# Altium PCB sheet1.PcbDoc
Units mm, origin at the board's own origin, x right, y up, seen from the top; angles counter-clockwise.
Board outline 22.04 x 29.91 mm, 2 copper layers (Top Layer, Bottom Layer); 6 components, 6 nets, 18 pads, 0 vias.
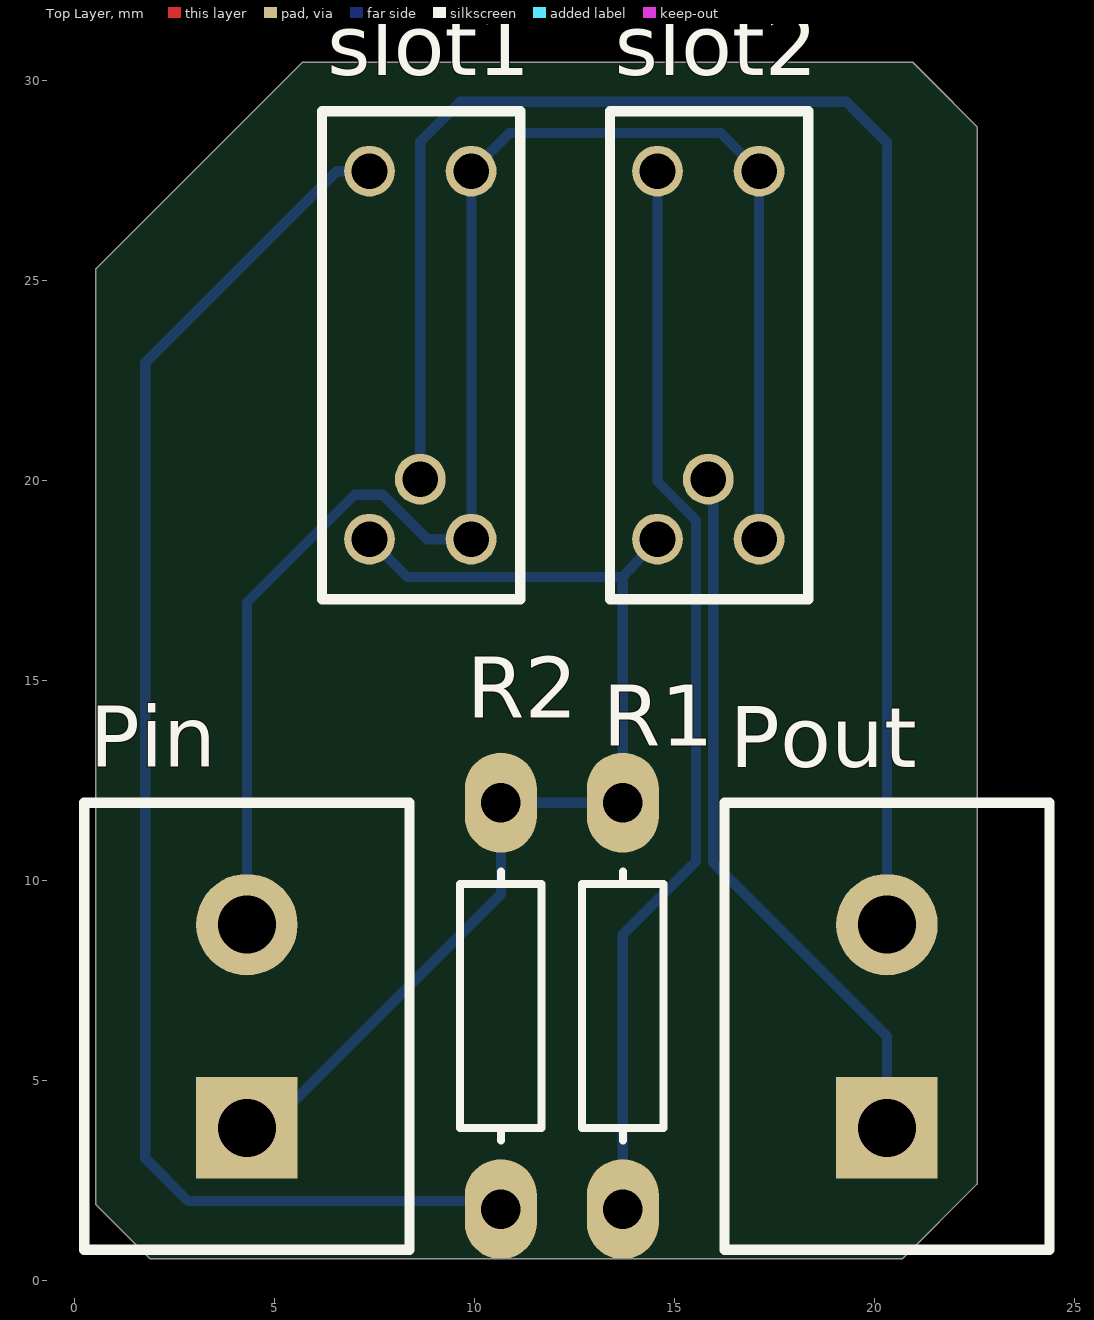
[diagram p0: Top Layer view]
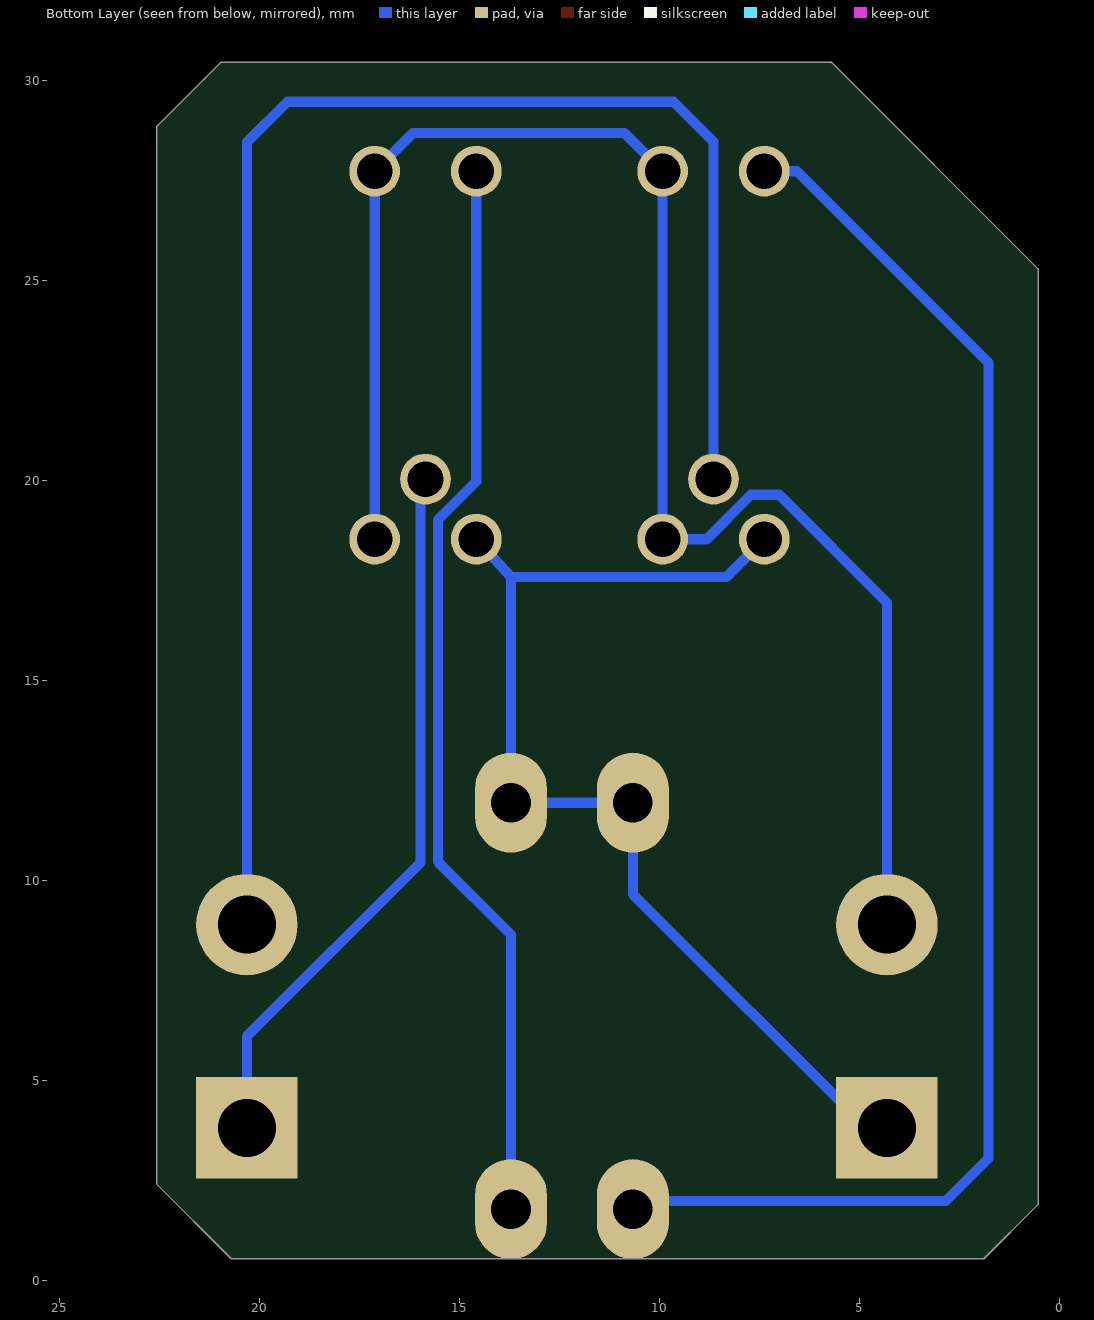
[diagram p1: Bottom Layer view, seen from below]

## Layer stack, top to bottom
Top Solder: solder mask 0.0102, Solder Resist, Dk 3.5
Top Layer: signal copper 0.0356
Dielectric1: dielectric 0.32, FR-4, Dk 4.8
Bottom Layer: signal copper 0.0356
Bottom Solder: solder mask 0.0102, Solder Resist, Dk 3.5

## Board outline
0.539,1.896 1.896,0.539 20.71,0.539 22.575,2.404 22.575,28.838 21.388,30.024 20.964,30.449 5.706,30.449 0.539,25.282

## Design rules (kind name [scope] priority, off if disabled: settings)
AssemblyTestPointUsage [All] p1: valid=2
BoardOutlineClearance [All] p1: gap=0.254
Clearance [All] p1: gap=0.178
ComponentClearance [All] p1: gap=0 collisioncheckmode=3 verticalgap=0 showdistances=FALSE
FabricationTestPointUsage [All] p1: valid=2 allowmultiple=FALSE
FabricationTestPointUsage TestPointUsage [All] p2: valid=0 allowmultiple=FALSE
FabricationTestpoint Testpoint [All] p2: side=3 testpointundercomponent=TRUE minsize=1.016 maxsize=2.54 preferedsize=1.524 minholesize=0 maxholesize=1.016 preferedholesize=0.813 testpointgrid=0.025 allowsidetop=TRUE allowsidebottom=TRUE usegrid=TRUE gridtolerance=0
Height [All] p1: minheight=0 maxheight=50.8 prefheight=12.7
HoleSize NPTH_withPads [(PadIsPlated = 'False') AND ((HoleDiameter < PadXSize_AllLayers ) OR (HoleDiameter < PadYSize_AllLayers))] p1: absolutevalues=TRUE maxlimit=0 minlimit=0 maxpercent=80.000 minpercent=20.000
HoleSize PadlessThruHole [(PadIsPlated = 'True') And ((HoleDiameter >= PadXSize_AllLayers ) OR (HoleDiameter >= PadYSize_AllLayers))] p2: absolutevalues=TRUE maxlimit=0 minlimit=0 maxpercent=80.000 minpercent=20.000
HoleSize HoleSize20 [HoleSize = 20 AND NOT(PadIsPlated)] p3: absolutevalues=TRUE maxlimit=0.508 minlimit=0.508 maxpercent=80.000 minpercent=20.000
HoleSize HoleSize20_p [HoleSize = 17 AND PadIsPlated] p4: absolutevalues=TRUE maxlimit=0.432 minlimit=0.432 maxpercent=80.000 minpercent=20.000
HoleSize HoleSize28 [HoleSize = 28 AND NOT(PadIsPlated)] p5: absolutevalues=TRUE maxlimit=0.711 minlimit=0.711 maxpercent=80.000 minpercent=20.000
HoleSize HoleSize28_p [HoleSize = 25 AND PadIsPlated] p6: absolutevalues=TRUE maxlimit=0.635 minlimit=0.635 maxpercent=80.000 minpercent=20.000
HoleSize HoleSize35 [HoleSize = 35 AND NOT(PadIsPlated)] p7: absolutevalues=TRUE maxlimit=0.889 minlimit=0.889 maxpercent=80.000 minpercent=20.000
HoleSize HoleSize35_p [HoleSize = 32 AND PadIsPlated] p8: absolutevalues=TRUE maxlimit=0.813 minlimit=0.813 maxpercent=80.000 minpercent=20.000
HoleSize HoleSize38 [HoleSize = 38 AND NOT(PadIsPlated)] p9: absolutevalues=TRUE maxlimit=0.965 minlimit=0.965 maxpercent=80.000 minpercent=20.000
HoleSize HoleSize38_p [HoleSize = 35 AND PadIsPlated] p10: absolutevalues=TRUE maxlimit=0.889 minlimit=0.889 maxpercent=80.000 minpercent=20.000
HoleSize HoleSize42 [HoleSize = 42 AND NOT(PadIsPlated)] p11: absolutevalues=TRUE maxlimit=1.067 minlimit=1.067 maxpercent=80.000 minpercent=20.000
HoleSize HoleSize42_p [HoleSize = 39 AND PadIsPlated] p12: absolutevalues=TRUE maxlimit=0.991 minlimit=0.991 maxpercent=80.000 minpercent=20.000
HoleSize HoleSize52 [HoleSize = 52 AND NOT(PadIsPlated)] p13: absolutevalues=TRUE maxlimit=1.321 minlimit=1.321 maxpercent=80.000 minpercent=20.000
HoleSize HoleSize52_p [HoleSize = 49 AND PadIsPlated] p14: absolutevalues=TRUE maxlimit=1.245 minlimit=1.245 maxpercent=80.000 minpercent=20.000
HoleSize HoleSize60 [HoleSize = 60 AND NOT(PadIsPlated)] p15: absolutevalues=TRUE maxlimit=1.524 minlimit=1.524 maxpercent=80.000 minpercent=20.000
HoleSize HoleSize60_p [HoleSize = 57 AND PadIsPlated] p16: absolutevalues=TRUE maxlimit=1.448 minlimit=1.448 maxpercent=80.000 minpercent=20.000
HoleSize HoleSize86 [HoleSize = 86 AND NOT(PadIsPlated)] p17: absolutevalues=TRUE maxlimit=2.184 minlimit=2.184 maxpercent=80.000 minpercent=20.000
HoleSize HoleSize86_p [HoleSize = 83 AND PadIsPlated] p18: absolutevalues=TRUE maxlimit=2.108 minlimit=2.108 maxpercent=80.000 minpercent=20.000
HoleSize HoleSize125 [HoleSize = 125 AND NOT(PadIsPlated)] p19: absolutevalues=TRUE maxlimit=3.175 minlimit=3.175 maxpercent=80.000 minpercent=20.000
HoleSize HoleSize125_p [HoleSize = 122 AND PadIsPlated] p20: absolutevalues=TRUE maxlimit=3.099 minlimit=3.099 maxpercent=80.000 minpercent=20.000
HoleSize HoleSize152 [HoleSize = 152 AND NOT(PadIsPlated)] p21: absolutevalues=TRUE maxlimit=3.861 minlimit=3.861 maxpercent=80.000 minpercent=20.000
HoleSize HoleSize152_p [HoleSize = 149 AND PadIsPlated] p22: absolutevalues=TRUE maxlimit=3.785 minlimit=3.785 maxpercent=80.000 minpercent=20.000
HoleSize HoleSizeNULL [HoleSize <> ((20 OR 28 OR 35 OR 38 OR 42 OR 52 OR 60 OR 86 OR 125 OR 152) AND NOT(PadIsPlated))] p23: absolutevalues=TRUE maxlimit=0 minlimit=0 maxpercent=80.000 minpercent=20.000
HoleSize HoleSizeNULL_p [HoleSize <> ((17 OR 25 OR 32 OR 35 OR 39 OR 49 OR 57 OR 83 OR 122 OR 149) AND PadIsPlated)] p24: absolutevalues=TRUE maxlimit=0 minlimit=0 maxpercent=80.000 minpercent=20.000
HoleSize [All] p25: absolutevalues=TRUE maxlimit=3.861 minlimit=0.025 maxpercent=80.000 minpercent=20.000
MinimumAnnularRing MinimumAnnularRing_Vias [IsVia] p1: minimumring=0.127
MinimumAnnularRing [All] p2: minimumring=0.178
PolygonConnect [All] p1: connectstyle=Relief reliefconductorwidth=0.254 reliefentries=4 polygonreliefangle="90 Angle" airgapwidth=0.254
RoutingVias RoutingViasSize_17 [HoleSize <= 17] p1: holewidth=0.432 width=1.27 viastyle="Through Hole" minholewidth=0.432 minwidth=0.686 maxholewidth=0.432 maxwidth=2.54
RoutingVias RoutingViasSize_25 [HoleSize <= 25] p2: holewidth=0.635 width=1.27 viastyle="Through Hole" minholewidth=0.635 minwidth=0.889 maxholewidth=0.635 maxwidth=2.54
RoutingVias RoutingViasSize_32 [HoleSize <= 32] p3: holewidth=0.813 width=1.27 viastyle="Through Hole" minholewidth=0.813 minwidth=1.067 maxholewidth=0.813 maxwidth=2.54
RoutingVias [All] p4: holewidth=0.635 width=1.27 viastyle="Through Hole" minholewidth=0.635 minwidth=1.27 maxholewidth=0.635 maxwidth=1.27
SilkToSilkClearance [All] p1: silktosilkclearance=0
SilkToSolderMaskClearance [All] p1: minsilkscreentomaskgap=0.127 clearancetoexposedcopper=FALSE
SilkToSolderMaskClearance SilkToCopperClearance [All] p2: minsilkscreentomaskgap=0.254 clearancetoexposedcopper=TRUE
SilkToSolderMaskClearance SilkscreenOverComponentPads [IsPad] p3: minsilkscreentomaskgap=0.254 clearancetoexposedcopper=TRUE
SolderMaskExpansion [All] p1: expansion=0.102
Width [All] p1: maxlimit=12.7 minlimit=0.178 preferedwidth=0.254
23 further rules are at their usual default settings.

## Components (designator, comment, footprint, x,y, rotation, side; value= is the part's Value field where it differs from the comment)
Pin "Term-Block power" TERM-BLOCK-5.08MM-2POS 4.318,8.89 r90 top
Pout "Term-Block out" TERM-BLOCK-5.08MM-2POS 20.32,8.89 r90 top
R1 "G-Res" Res10mm_LGE1.0 13.716,6.858 r90 top
R2 "G-Res" Res10mm_LGE1.0 10.668,6.858 r90 top
slot1 "S1-SlotDetectorLarge" S-SLot3 9.924,27.726 r90 top
slot2 "S2-SlotDetectorLarge" S-SLot3 17.124,27.726 r90 top

## Footprints (in the part's own frame and the unit in brackets; to place one, negate y for a bottom-side part, rotate by r counter-clockwise, add the part's x,y. Pads: shape width x height; smd on the part's side, far side on the other; paste and mask are expansions set on the pad)
Res10mm_LGE1.0 [mm] "Axial Device, Thru-Hole; 2 Leads; 0.4 in Pin Spacing"
  oval 2.5x1.8 hole 0.991: 1(-5.08,0) 2(5.08,0)
  silkscreen extent -3.37,-1.02 3.37,1.02
S-SLot3 [mil] "GP1A52HPJ00F"
  round 50 hole 35: 1(0,0) 2(0,100) 3(-362.2,100) 4(-303.15,50) 5(-362.2,0)
  silkscreen extent -421,-48 59,147
TERM-BLOCK-5.08MM-2POS [mil] "TERM BLOCK 5.08MM VERT 2POS PCB"
  rect 100x100 hole 57: 1(-200,0)
  round 100 hole 57: 2(0,0)
  silkscreen extent -320,-160 120,160

## Part data
Pin Pout: library part C-Block2, "Terminal-Block 1x2"
R1 R2: "Resistor (specify value)"
slot1: library part S2-SlotDetectorLarge

## Nets (pads, with @x,y where several pads share a name; then routed paths per layer and width w, separated by ;. In a path a pad name is that pad's centre, name@x,y a point inside that pad or via, vN(x,y) a via of type N, cw(c..) or ccw(c..) an arc to the next point about the centre after c; other vN are vias at no path point)
NetPin_1: Pin.1 R1.2 R2.2 slot1.3 slot2.3 | length 27.8
  Bottom Layer w0.254: Pin.1 4.826,3.81 10.668,9.652 R2.2 R1.2 13.716,17.577 ; slot1.3 8.333,17.577 13.716,17.577 ; slot2.3 13.716,17.577
NetPin_2: Pin.2 slot1.1 slot1.5 slot2.1 slot2.5 | length 41.6
  Bottom Layer w0.254: Pin.2 4.318,16.944 7.01,19.637 7.714,19.637 8.825,18.526 slot1.5 9.931,18.533 9.931,27.726 slot1.1 10.875,28.677 16.173,28.677 slot2.1 slot2.5
NetPout_1: Pout.1 slot2.4 | length 18.1
  Bottom Layer w0.254: slot2.4 15.854,19.66 15.977,19.66 15.977,10.439 20.32,6.096 Pout.1
NetPout_2: Pout.2 slot1.4 | length 40.5
  Bottom Layer w0.254: slot1.4 8.654,28.466 9.652,29.464 19.304,29.464 20.32,28.448 Pout.2
NetR1_1: R1.1 slot2.2 | length 27.1
  Bottom Layer w0.254: R1.1 13.716,8.636 15.545,10.465 15.545,19.006 14.584,19.967 slot2.2
NetR2_1: R2.1 slot1.2 | length 37
  Bottom Layer w0.254: slot1.2 6.568,27.726 1.778,22.936 1.778,3.048 2.845,1.981 10.668,1.981 R2.1

## Silkscreen, mask and mechanical layers (free items; w line width, h text height)
Mechanical 1:
  lines w0.254: 0.254,0.254 22.86,0.254 22.86,30.226 22.86,31.75 0.254,31.75 0.254,0.254
Mechanical 16:
  drawing of 1874 lines, arcs and shapes, not listed
  text "1" at -29.286,135.509 h1.78
  text "2" at 43.358,135.509 h1.78
  text "3" at 116.51,135.509 h1.78
  text "4" at 189.408,135.509 h1.78
  text "A" at -63.627,112.497 h1.78
  text "A" at 223.393,112.497 h1.78
  text "B" at -63.627,64.44 h1.78
  text "B" at 223.393,64.44 h1.78
  text "C" at -63.627,15.926 h1.78
  text "C" at 223.393,15.926 h1.78
  text "ENGINEER:" at 108.458,-21.082 h1.14
  text "TITLE:" at 146.558,-21.082 h1.14
  text "PCB DESIGNER:" at 108.458,-28.575 h1.14
  text "D" at -63.627,-32.08 h1.78
  text "D" at 223.393,-32.08 h1.78
  text "DATE:" at 108.458,-36.322 h1.14
  text "PART NO.:" at 146.558,-36.322 h1.14
  text "REV:" at 199.898,-36.322 h1.14
  text "Altium Limited" at 75.438,-38.862 h1.78
  text ".PRINT_DATE" at 109.728,-39.37 h1.78
  text "12a Rodborough Rd" at 75.438,-41.402 h1.78
  text "Frenchs Forest" at 75.438,-43.942 h1.78
  text "FILE NAME:" at 108.458,-43.942 h1.14
  text "DWG NO:" at 146.558,-43.942 h1.14
  text "SCALE:" at 199.898,-43.942 h1.14
  text "NSW 2086" at 75.438,-46.482 h1.78
  text ".PCB_FILE_NAME_NO_PATH" at 109.728,-46.99 h1.78
  text "1" at -29.286,-52.451 h1.78
  text "2" at 43.358,-52.451 h1.78
  text "3" at 116.51,-52.451 h1.78
  text "4" at 189.408,-52.451 h1.78